# Altium PCB JTAG.PcbDoc
Units mil, origin at the board's own origin, x right, y up, seen from the top; angles counter-clockwise.
Board outline 1968.5 x 1023.62 mil, 2 copper layers (Top Layer, Bottom Layer); 14 components, 9 nets, 94 pads, 113 vias.
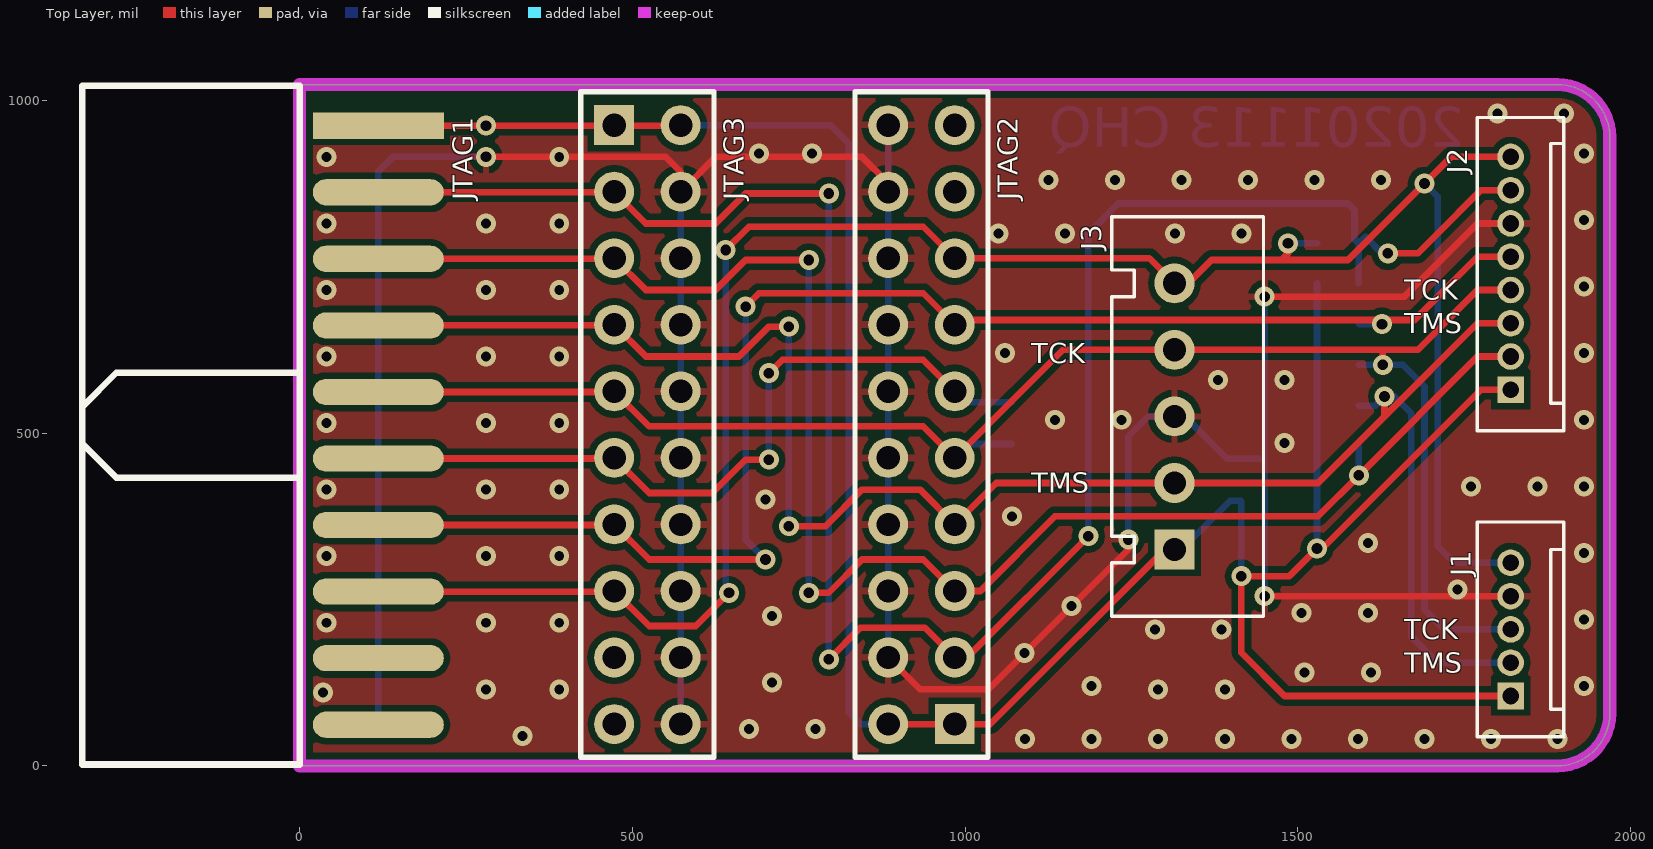
[diagram p0: Top Layer view]
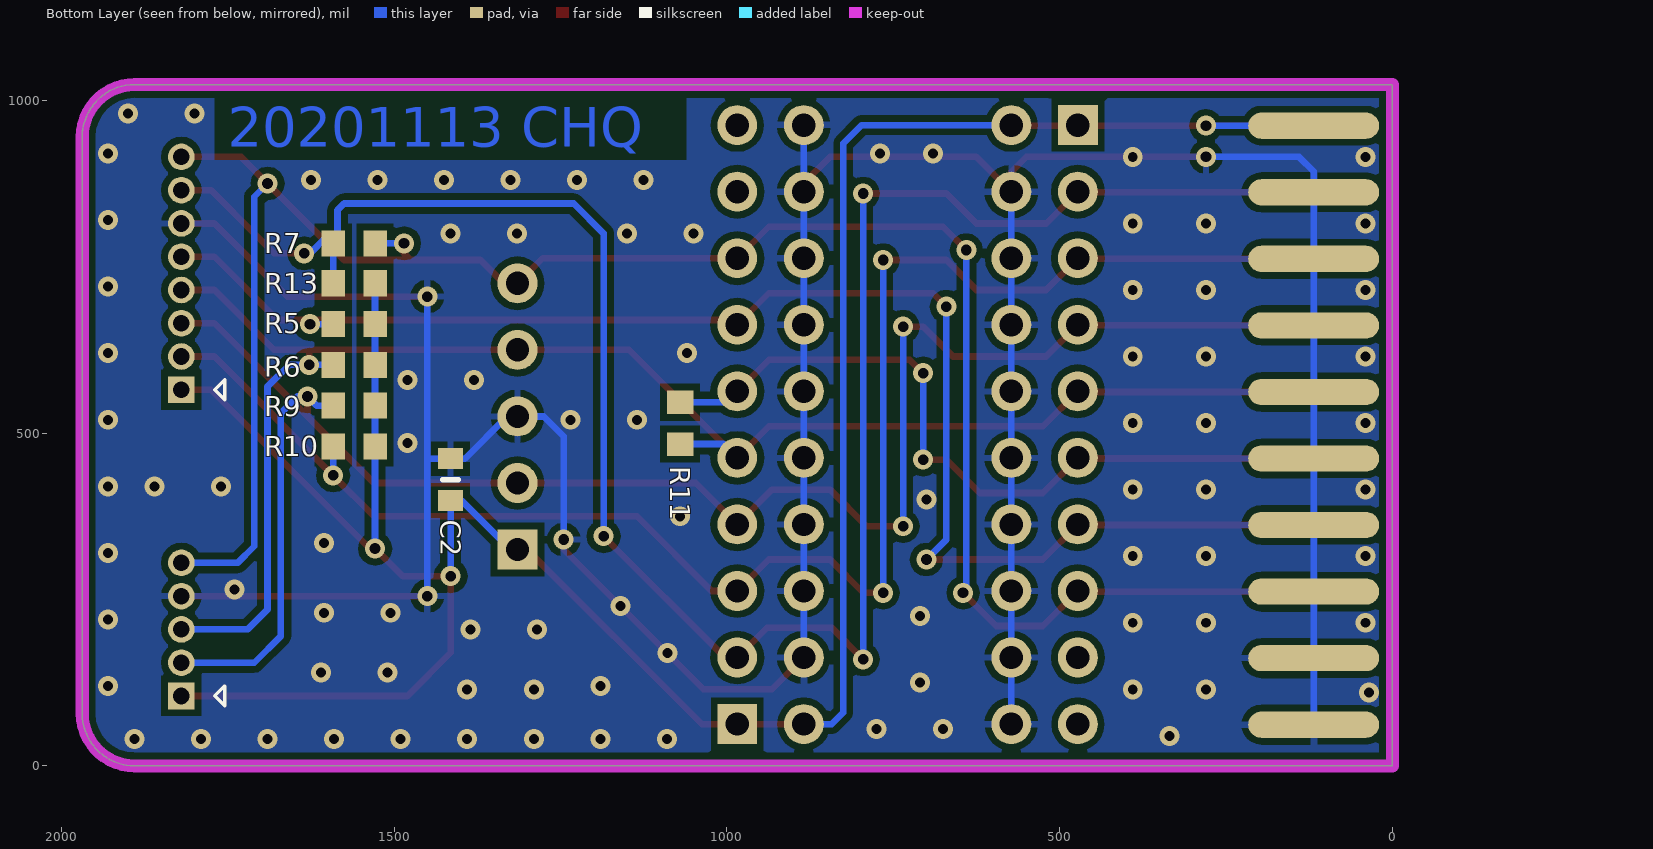
[diagram p1: Bottom Layer view, seen from below]
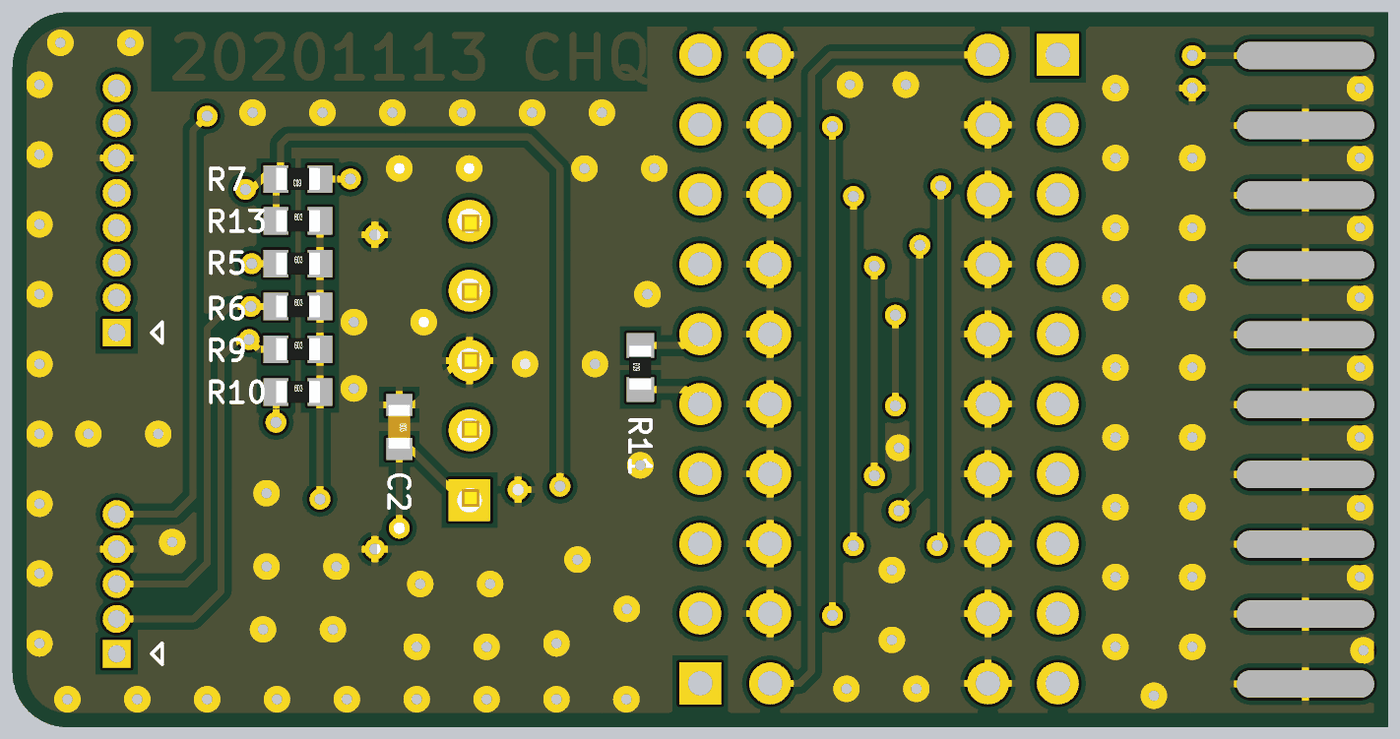
[diagram p2: 3D render of the assembled board from below, using the file's embedded part models]

## Layer stack, top to bottom
Top Solder: solder mask 0.4, Solder Resist, Dk 3.5
Top Layer: signal copper 1.4
Dielectric 1: dielectric 12.6, FR-4, Dk 4.8
Bottom Layer: signal copper 1.4
Bottom Solder: solder mask 0.4, Solder Resist, Dk 3.5

## Board outline
0,0 1889.76,0 ccw(c1889.76,78.74) 1968.5,78.74 1968.5,944.88 ccw(c1889.76,944.88) 1889.76,1023.62 0,1023.62

## Design rules (kind name [scope] priority, off if disabled: settings)
Clearance [All] p1: gap=10 ignorepadtopadclearanceinfootprint=FALSE except(0: Arc-Hole Track-Hole SMDPad-Hole THPad-Hole Via-Hole Fill-Hole Poly-Hole Region-Hole Text-Hole)
PolygonConnect [All] p1: connectstyle=Relief reliefconductorwidth=10 reliefentries=4 polygonreliefangle="90 Angle" airgapwidth=10
RoutingVias [All] p1: holewidth=16 width=30 viastyle="Through Hole" minholewidth=16 minwidth=30 maxholewidth=28 maxwidth=50
SolderMaskExpansion [All] p1: expansion=4
Width [All] p1: maxlimit=10 minlimit=10 preferedwidth=10
30 further rules are at their usual default settings.

## Classes and differential pairs
component class JTAG: C2 J1 J2 J3 JTAG1 JTAG3 R5 R6 R7 R9 R10 R11 R13

## Components (designator, comment, footprint, x,y, rotation, side; value= is the part's Value field where it differs from the comment)
C2 "Cap" CAPC1608X90N 1415,430 r270 bottom value=0.1uF
J1 "Header 5" HDR5X1_B1_1.27 1819.45,205 r90 top
J2 "Header 8" HDR8X1_B1_1.27 1819.45,740 r90 top
J3 "Header 5" HDR5X1_B1 1314.45,525 r90 top
JTAG1 "JTAG-20PIN" HDR10X2_E2 118.11,511.81 r90 top locked
JTAG2 "JTAG-20PIN" HDR10X2_A1 984.25,62.72 r90 top locked
JTAG3 "JTAG-20PIN" HDR10X2_A1 472.44,962.72 r270 top locked
R5 "RES" RESC1608X50N 1560,663.75 r180 bottom value=100K
R6 "RES" RESC1608X50N 1560,602.5 r180 bottom value=100K
R7 "RES" RESC1608X50N 1560,785 r0 bottom value=0R
R9 "RES" RESC1608X50N 1560,541.25 r180 bottom value=100K
R10 "RES" RESC1608X50N 1560,480 r180 bottom value=100K
R11 "RES" RESC1608X50N 1070,515 r90 bottom value=0R
R13 "RES" RESC1608X50N 1560,725 r180 bottom value=100K

## Footprints (in the part's own frame and the unit in brackets; to place one, negate y for a bottom-side part, rotate by r counter-clockwise, add the part's x,y. Pads: shape width x height; smd on the part's side, far side on the other; paste and mask are expansions set on the pad)
CAPC1608X90N [mm] "0603;Capacitor;1.60mm L X 0.80mm W X 0.90mm H"
  rect 0.8x0.95 smd: 1(-0.8,0) 2(0.8,0)
  silkscreen extent 0,-0.3 0,0.3, body extent -0.8,-0.4 0.8,0.4, height 0.3
HDR5X1_B1 [mil] "XH连接器"
  rect 60x60 hole 35: 1(-200,0)
  round 60 hole 35: 2(-100,0) 3(0,0) 4(100,0) 5(200,0)
  silkscreen extent -300,-134 300,94, body extent -296,-132 296,94, height 276
HDR5X1_B1_1.27 [mil] "XH连接器"
  rect 40x40 hole 25: 1(-100,0)
  round 40 hole 25: 2(-50,0) 3(0,0) 4(50,0) 5(100,0)
  silkscreen extent -161,-80 161,50, body extent -107,-12 108,13, height 165
HDR8X1_B1_1.27 [mil] "XH连接器"
  rect 40x40 hole 25: 1(-175,0)
  round 40 hole 25: 2(-125,0) 3(-75,0) 4(-25,0) 5(25,0) 6(75,0) 7(125,0) 8(175,0)
  silkscreen extent -236,-80 234,50
HDR10X2_A1 [mil] "Connector; Header; 10x2 Position"
  rect 60x60 hole 35: 1(0,0)
  round 60 hole 35: 2(0,100) 3(100,0) 4(100,100) 5(200,0) 6(200,100) 7(300,0) 8(300,100) 9(400,0) 10(400,100) 11(500,0) 12(500,100) 13(600,0) 14(600,100) 15(700,0) 16(700,100) 17(800,0) 18(800,100) 19(900,0) 20(900,100)
  silkscreen extent -50,-50 950,150
HDR10X2_E2 [mm]
  rect 1x5 smd: 1(11.43,0)
  oval 1x5 smd far side: 2(11.43,0) 4(8.89,0) 6(6.35,0) 8(3.81,0) 10(1.27,0) 12(-1.27,0) 14(-3.81,0) 16(-6.35,0) 18(-8.89,0) 20(-11.43,0)
  oval 1x5 smd: 3(8.89,0) 5(6.35,0) 7(3.81,0) 9(1.27,0) 11(-1.27,0) 13(-3.81,0) 15(-6.35,0) 17(-8.89,0) 19(-11.43,0)
  silkscreen extent -12.95,3 12.95,11.3
RESC1608X50N [mm] "0603;Resistor;1.60mm L X 0.80mm W X 0.50mm H"
  rect 0.9x1 smd: 1(-0.8,0) 2(0.8,0)
  body extent -0.8,-0.4 0.8,0.4, height 0.3

## Part data
C2: "Capacitor", LatestRevisionDate=17-Jul-2002, LatestRevisionNote="Re-released for DXP Platform.", PackageReference=RAD-0.3, Published=8-Jun-2000, Publisher="Altium Limited"
J1 J3: "Header,5-Pin"
J2: "Header, 8-Pin", LatestRevisionDate=17-Jul-2002, LatestRevisionNote="Re-released for DXP Platform.", Publisher="Altium Limited"
JTAG1 JTAG2 JTAG3: library part ARM_JTAG, "ARM_JTAG-20PIN"
R5 R6 R7 R9 R10 R11 R13: "贴片电阻", LatestRevisionDate=17-Jul-2002, LatestRevisionNote="Re-released for DXP Platform.", PackageReference=AXIAL-0.4, Published=8-Jun-2000, Publisher="Altium Limited"

## Via types
v1: diameter 30, hole 15, Top Layer to Bottom Layer, 86 vias
v2: diameter 30, hole 16, Top Layer to Bottom Layer, 27 vias

## Nets (pads, with @x,y where several pads share a name; then routed paths per layer and width w, separated by ;. In a path a pad name is that pad's centre, name@x,y a point inside that pad or via, vN(x,y) a via of type N, cw(c..) or ccw(c..) an arc to the next point about the centre after c; other vN are vias at no path point)
DGND: C2.1 J1.4 J2.6 J3.3 JTAG1.4 JTAG1.6 JTAG1.8 JTAG1.10 JTAG1.12 JTAG1.14 JTAG1.16 JTAG1.18 JTAG1.20 JTAG2.4 JTAG2.6 JTAG2.8 JTAG2.10 JTAG2.12 JTAG2.14 JTAG2.16 JTAG2.18 JTAG2.20 JTAG3.4 JTAG3.6 JTAG3.8 JTAG3.10 JTAG3.12 JTAG3.14 JTAG3.16 JTAG3.18 JTAG3.20 | length 5412.9
  Top Layer w10: v2(280,915) 550,915 572.44,892.56 JTAG3.4 572.72,862.72 625,915 845,915 884.25,875.75 JTAG2.18 ; JTAG2.4 931.97,115 1035,115 1245,325 v2(1245,340) ; v2(1450,255) J1.4 ; v2(1450,705) 1660,705 1770,815 J2.6
  Bottom Layer w10: JTAG1.20 JTAG1.18 JTAG1.16 JTAG1.14 JTAG1.12 JTAG1.10 JTAG1.8 JTAG1.6 JTAG1.4 118.11,893.11 140,915 v2(280,915) ; JTAG3.20 JTAG3.18 JTAG3.16 JTAG3.14 JTAG3.12 JTAG3.10 JTAG3.8 JTAG3.6 JTAG3.4 ; JTAG2.4 JTAG2.6 JTAG2.8 JTAG2.10 JTAG2.12 JTAG2.14 JTAG2.16 JTAG2.18 JTAG2.20 ; v2(1245,340) 1245,495 1275,525 J3.3 1330,525 1393.5,461.5 C2.1 1448.5,461.5 1450,460 ; v2(1450,255) 1450,460 ; v2(1450,705) 1450,460
  other v1: 1090,40 1190,40 1290,40 1390,40 1490,40 1590,40 1690,40 1790,40 1890,40 335,45 675,55 775,55 35,110 280,115 390,115 1290,115 1390,115 1190,120 1930,120 710,125 1510,140 1610,140 1089.29,169.29 1285,205 1385,205 40,215 280,215 390,215 1930,220 710,225 1505,230 1605,230 1160,240 1740,265 40,315 280,315 390,315 1930,320 1605,335 1070,375 700,400 40,415 280,415 390,415 1760,420 1860,420 1930,420 1480,485 40,515 280,515 390,515 1135,520 1235,520 1930,520 1380,580 1480,580 40,615 280,615 390,615 1060,620 1930,620 40,715 280,715 390,715 1930,720 1050,800 1150,800 1315,800 1415,800 40,815 280,815 390,815 1930,820 1125,880 1225,880 1325,880 1425,880 1525,880 1625,880 40,915 390,915 690,920 770,920 1930,920 1800,980 1900,980
PA13/JTMS_SWDAT: J1.2 J2.3 J3.2 JTAG1.7 JTAG2.7 JTAG3.7 R9.1 | length 2835.3
  Top Layer w10: JTAG1.7 471.54,661.81 JTAG3.7 520.16,615 660,615 705,660 v2(735,660) ; v2(735,360) 790,360 845,415 931.97,415 JTAG2.7 1046.54,425 J3.2 1530,425 1630,525 ; v2(1630,555) 1630,525 ; J2.3 1770,665 1630,525
  Bottom Layer w10: v2(735,360) v2(735,660) ; R9.1 1616.25,541.25 v2(1630,555) 1645,555 1670,530 1670,195 1710,155 J1.2
PA14/JTCK_SWCLK: J1.3 J2.4 J3.4 JTAG1.9 JTAG2.9 JTAG3.9 R6.1 R11.1 | length 2554.4
  Top Layer w10: JTAG1.9 471.54,561.81 JTAG3.9 525.16,510 936.97,510 JTAG2.9 1146.54,625 J3.4 1625,625 ; v2(1627.5,602.5) 1627.5,622.5 1625,625 ; J2.4 1770,715 1680,625 1625,625
  Bottom Layer w10: JTAG2.9 1005.04,483.5 R11.1 ; R6.1 v2(1627.5,602.5) 1657.5,602.5 1690,570 1690,235 1720,205 J1.3
PA15/JTDI: J2.2 JTAG1.5 JTAG2.5 JTAG3.5 R10.1 | length 2469.8
  Top Layer w10: JTAG1.5 471.54,761.81 JTAG3.5 520.16,715 625,715 670,760 v2(765,760) ; v2(765,260) 795,260 845,310 936.97,310 JTAG2.5 1022.72,262.72 1135,375 1530,375 v2(1591.5,436.5) 1770,615 J2.2
  Bottom Layer w10: v2(765,260) v2(765,760) ; v2(1591.5,436.5) R10.1
PB3/JTDO: J2.5 JTAG1.13 JTAG2.13 JTAG3.13 R5.1 | length 2255.2
  Top Layer w10: JTAG1.13 471.54,361.81 JTAG3.13 525.16,310 v2(700,310) ; v2(670,690) 690,710 936.97,710 JTAG2.13 984.25,670 1675,670 1770,765 J2.5
  Bottom Layer w10: v2(670,690) 670,340 v2(700,310) ; R5.1 v2(1626.25,663.75)
PB4/JNTRST: J2.7 JTAG1.3 JTAG2.3 JTAG3.3 R7.2 R13.1 | length 3191.9
  Top Layer w10: JTAG1.3 471.54,861.81 JTAG3.3 472.44,862.56 520,815 625,815 670,860 v2(795,860) ; v2(795,160) 842.72,207.72 939.25,207.72 JTAG2.3 1002.72,162.72 v2(1185,345) ; v2(1635,770) 1680,770 1705,795 1775,865 J2.7
  Bottom Layer w10: v2(795,160) v2(795,860) ; v2(1185,345) 1185,800 1230,845 1575,845 1585,835 1585,791.5 R7.2 ; R13.1 R7.2 ; v2(1635,770) 1626.5,770 1601.5,795 R7.2
RESET: J1.5 J2.8 J3.5 JTAG1.15 JTAG2.15 JTAG3.15 R7.1 | length 3140.5
  Top Layer w10: JTAG1.15 471.54,261.81 JTAG3.15 525.16,210 595,210 v2(645,260) ; v2(640,775) 675,810 936.97,810 JTAG2.15 1276.73,762.72 J3.5 1335,725 1370,760 1475,760 ; v2(1485,785) 1485,770 1475,760 ; J2.8 1730,915 v2(1690,875) 1575,760 1475,760
  Bottom Layer w10: v2(640,775) 640,265 v2(645,260) ; v2(1485,785) R7.1 ; v2(1690,875) 1710,855 1710,330 1735,305 J1.5
RTCK: JTAG1.11 JTAG2.11 JTAG3.11 R11.2 | length 1169.4
  Top Layer w10: JTAG1.11 471.54,461.81 JTAG3.11 525.16,410 620,410 670,460 v2(705,460) v2@715,460 ; v2(705,590) 725,610 936.97,610 JTAG2.11
  Bottom Layer w10: v2(705,460) v2(705,590) ; JTAG2.11 1000.47,546.5 R11.2
VDD3P3: C2.2 J1.1 J2.1 J3.1 JTAG1.1 JTAG1.2 JTAG2.1 JTAG2.2 JTAG3.1 JTAG3.2 R5.2 R6.2 R9.2 R10.2 R13.2 | length 4067.6
  Top Layer w10: JTAG1.1 v2(280,961.81) 571.54,961.81 JTAG3.2 ; JTAG2.2 JTAG2.1 1037.72,62.72 1300,325 J3.1 1314.45,315.55 J3.1@1323.9,325 ; v2(1528.5,326.5) 1487.01,285 v2(1415,285) 1415,170 1480,105 J1.1 ; v2@1535,325 1775,565 J2.1
  Bottom Layer w10: JTAG1.2 v2(280,961.81) ; JTAG3.2 797.28,962.72 825,935 825,80 842.28,62.72 JTAG2.2 ; J3.1 1325,325 1398.5,398.5 C2.2 v2(1415,285) ; v2(1528.5,326.5) R10.2 R9.2 R13.2
pads on no net: JTAG1.17 JTAG1.19 JTAG2.17 JTAG2.19 JTAG3.17 JTAG3.19

## Polygon pours and split planes (outlines as drawn)
DGND on Bottom Layer (solid, remove dead copper, pour order 32): 0,1023.62 1968.62,1023.62 1970,1025 1970,0 0,0
DGND on Bottom Layer "DGND" (solid, pour order 10): -590.55,0
no net on Bottom Layer "Bottom Layer-No Net" (solid, pour order 4): -320.55,-35
DGND on Top Layer (solid, remove dead copper, pour order 30): 0,1023.62 1968.62,1023.62 1970,1025 1970,0 0,0

## Keep-outs
Keep-Out Layer:
  the board outline again, w19.68

## Other copper
Bottom Layer:
  text "20201113 CHQ" at 1750,930 h60

## Silkscreen, mask and mechanical layers (free items; w line width, h text height)
Top Overlay:
  text "TCK" at 1659.45,700 h30
  text "TMS" at 1659.45,650 h30
  text "TCK" at 1099.45,605 h30
  text "TMS" at 1099.45,410 h30
  text "TCK" at 1659.45,190 h30
  text "TMS" at 1659.45,140 h30